# Altium PCB PCB1.PcbDoc
Units mm, origin at the board's own origin, x right, y up, seen from the top; angles counter-clockwise.
Board outline 70 x 27 mm, 2 copper layers (Top Layer, Bottom Layer); 13 components, 21 nets, 135 pads, 0 vias.
Unrouted connection lines stored in the file: 48.
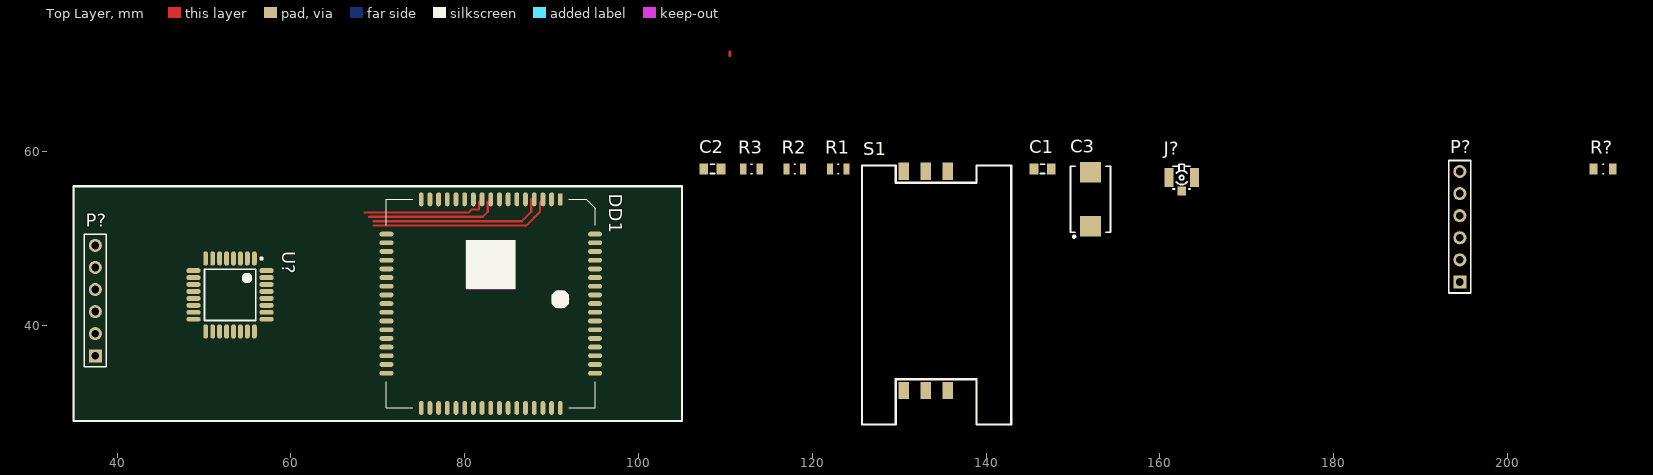
[diagram p0: Top Layer view]
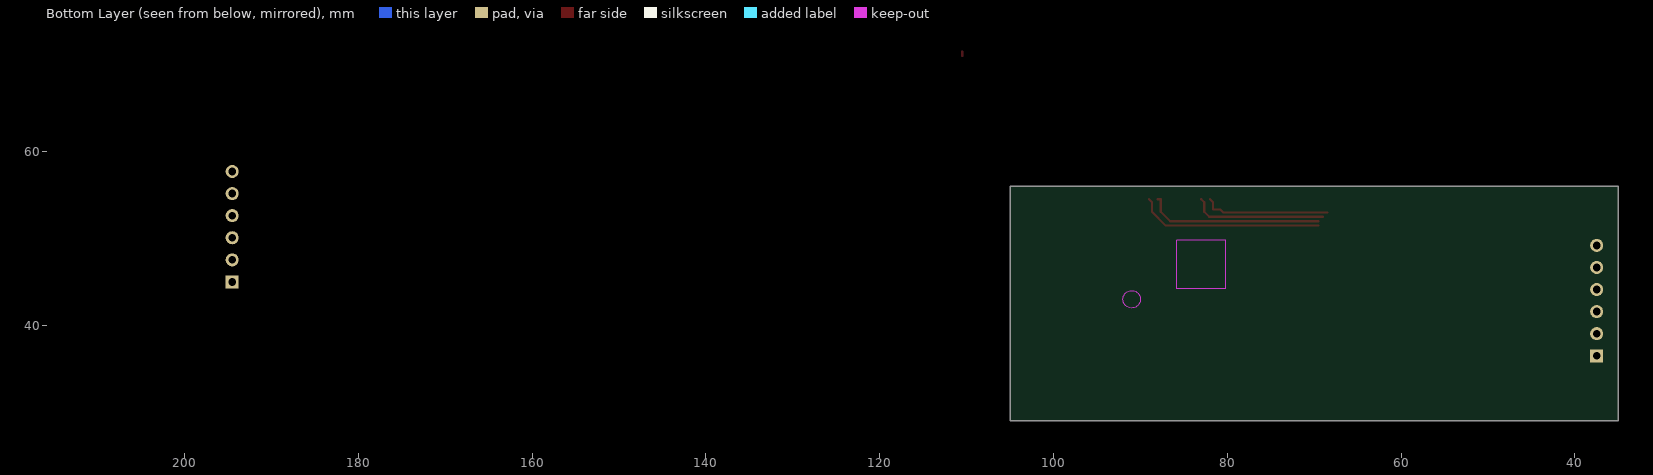
[diagram p1: Bottom Layer view, seen from below]

## Layer stack, top to bottom
Top Solder: solder mask 0.0102, Solder Resist, Dk 3.5
Top Layer: signal copper 0.0356
Dielectric 1: dielectric 0.32, FR-4, Dk 4.8
Bottom Layer: signal copper 0.0356
Bottom Solder: solder mask 0.0102, Solder Resist, Dk 3.5

## Board outline
35,29 35,56 105,56 105,29

## Design rules (kind name [scope] priority, off if disabled: settings)
Clearance [All] p1: gap=0.254
PolygonConnect [All] p1: connectstyle=Relief reliefconductorwidth=0.254 reliefentries=4 polygonreliefangle="90 Angle" airgapwidth=0.254
RoomDefinition Sheet1 [InComponentClass('Sheet1')] p1: confinementstyle=ConfineIn formatcopy=TRUE lockcomponents=FALSE outline 106.5,28 213,28 213,62 106.5,62
RoutingVias [All] p1: holewidth=0.711 width=1.27 viastyle="Through Hole" minholewidth=0.711 minwidth=1.27 maxholewidth=0.711 maxwidth=1.27
SolderMaskExpansion [All] p1: expansion=0.102
Width [All] p1: maxlimit=0.254 minlimit=0.254 preferedwidth=0.254
30 further rules are at their usual default settings.

## Classes and differential pairs
component class Sheet1: C1 C2 C3 DD1 J? P? R1 R2 R3 R? S1 U?

## Components (designator, comment, footprint, x,y, rotation, side; value= is the part's Value field where it differs from the comment)
C1 "Cap" CAPC(0805)2012X07N 146.5,58 r0 top
C2 "Cap" CAPC(0805)2012X07N 108.5,58 r0 top
C3 "10uF" CAPMP7343X310N 152,54.5 r90 top
DD1 "SIM900" SIM900 91,54.5 r270 top
J? "U.FL" HIROSE_U.FL-R-SMT-1(10) 162.5,57 r0 top
P? "Header 6" HDR1X6 194.5,45 r90 top
P? "Header 6" HDR1X6 37.5,36.5 r90 top
R1 "Resistor" RESC(0805)2112X05N 123,58 r0 top
R2 "Resistor" RESC(0805)2112X05N 118,58 r0 top
R3 "Resistor" RESC(0805)2112X05N 113,58 r0 top
R? "Resistor" RESC(0805)2112X05N_wave 211,58 r0 top
S1 "SIM0424" SIM0424 130.5,32.5 r90 top
U? "ATmega8-16AU" 32A_N 53,43.5 r270 top

## Footprints (in the part's own frame and the unit in brackets; to place one, negate y for a bottom-side part, rotate by r counter-clockwise, add the part's x,y. Pads: shape width x height; smd on the part's side, far side on the other; paste and mask are expansions set on the pad)
32A_N [mm] "Thin QFP, 32-Leads, Body 7x7mm, Pitch 0.8mm, IPC Medium Density"
  oval 1.65x0.55 smd: 1(-4.2,2.8) 2(-4.2,2) 3(-4.2,1.2) 4(-4.2,0.4) 5(-4.2,-0.4) 6(-4.2,-1.2) 7(-4.2,-2) 8(-4.2,-2.8) 17(4.2,-2.8) 18(4.2,-2) 19(4.2,-1.2) 20(4.2,-0.4) 21(4.2,0.4) 22(4.2,1.2) 23(4.2,2) 24(4.2,2.8)
  oval 0.55x1.65 smd: 9(-2.8,-4.2) 10(-2,-4.2) 11(-1.2,-4.2) 12(-0.4,-4.2) 13(0.4,-4.2) 14(1.2,-4.2) 15(2,-4.2) 16(2.8,-4.2) 25(2.8,4.2) 26(2,4.2) 27(1.2,4.2) 28(0.4,4.2) 29(-0.4,4.2) 30(-1.2,4.2) 31(-2,4.2) 32(-2.8,4.2)
  silkscreen extent -4.32,-2.95 2.95,3.75, body extent -3.5,-3.5 3.5,3.5, height 1.2
CAPC(0805)2012X07N [mm] "Chip Diode, 2-Leads, Body 2,01x1,25mm, IPC Medium Density"
  rect 1x1.25 smd: 1(-1,0) 2(1,0)
  silkscreen extent -0.25,-0.53 0.25,0.53, body extent -0.8,-0.42 0.8,0.44, height 0.8
CAPMP7343X310N [mm] "Capacitor, Polarized, Molded  Body 7.3x4.3mm, IPC Medium Density"
  rect 2.35x2.45 smd: 1(-3.1,0) 2(3.1,0)
  silkscreen extent -4.42,-2.3 3.8,2.3, body extent -3.8,-2.3 3.8,2.3, height 3.1
HDR1X6 [mm] "Connector; Header; 6 Position"
  rect 1.5x1.5 hole 0.9: 1(0,0)
  round 1.5 hole 0.9: 2(2.54,0) 3(5.08,0) 4(7.62,0) 5(10.16,0) 6(12.7,0)
  silkscreen extent -1.27,-1.27 13.97,1.27
HIROSE_U.FL-R-SMT-1(10) [mm] "Up to 6GHz Ultra Small Surface Mount Male Coaxial Connectors U.FL Series"
  rect 1x1.05 smd: 1(0,-1.525)
  rect 1.05x2.2 smd: 2(-1.475,0) 2(1.475,0)
  silkscreen extent -1,-1.3 1,1.55, body extent -1.5,-1.55 1.5,1.55, height 1.25
RESC(0805)2112X05N [mm] "Chip Diode, 2-Leads, Body 2,05x1,25mm, IPC Medium Density"
  rect 0.7x1.3 smd: 1(-0.95,0) 2(0.95,0)
  silkscreen extent -0.05,-0.55 0.05,0.55, body extent -1,-0.61 1,0.61, height 0.5
RESC(0805)2112X05N_wave [mm] "Chip Diode, 2-Leads, Body 2,05x1,25mm, IPC Medium Density"
  rect 0.9x1.3 smd: 1(-1.1,0) 2(1.1,0)
  silkscreen extent -0.05,-0.55 0.05,0.55, body extent -1,-0.61 1,0.61, height 0.5
SIM0424 [mm] "Sim Holder SIM0424"
  rect 2x1.2 smd: 1(25.22,0) 2(25.22,-2.54) 3(25.22,-5.08) 4(0,0) 5(0,-2.54) 6(0,-5.08)
  silkscreen extent -3.9,-12.4 25.9,4.8, body extent -3.91,-12.4 25.73,4.8, height 2.6
SIM900 [mm] "PCB for sim900"
  rrect50% 1.4x0.55 smd: 1(0,0)
  oval 1.6x0.55 smd: 2(0,-1) 3(0,-2) 4(0,-3) 5(0,-4) 6(0,-5) 7(0,-6) 8(0,-7) 9(0,-8) 10(0,-9) 11(0,-10) 12(0,-11) 13(0,-12) 14(0,-13) 15(0,-14) 16(0,-15) 17(0,-16) 35(24,-16) 36(24,-15) 37(24,-14) 38(24,-13) 39(24,-12) 40(24,-11) 41(24,-10) 42(24,-9) 43(24,-8) 44(24,-7) 45(24,-6) 46(24,-5) 47(24,-4) 48(24,-3) 49(24,-2) 50(24,-1) 51(24,0)
  oval 0.55x1.6 smd: 18(4,-20) 19(5,-20) 20(6,-20) 21(7,-20) 22(8,-20) 23(9,-20) 24(10,-20) 25(11,-20) 26(12,-20) 27(13,-20) 28(14,-20) 29(15,-20) 30(16,-20) 31(17,-20) 32(18,-20) 33(19,-20) 34(20,-20) 52(20,4) 53(19,4) 54(18,4) 55(17,4) 56(16,4) 57(15,4) 58(14,4) 59(13,4) 60(12,4) 61(11,4) 62(10,4) 63(9,4) 64(8,4) 65(7,4) 66(6,4) 67(5,4) 68(4,4)
  Keep-Out Layer circle w0.127: c11.5,0 r1.005
  Keep-Out Layer lines w0.127: 10.3,-10.8 4.7,-10.8 4.7,-5.2 10.3,-5.2 10.3,-10.8
  silkscreen extent 0,-20 24,4, body extent 0,-20 24,4, height 3.02

## Part data
C1 C2: "Capacitor"
C3: library part CTE7343-31_10UF_25V_10%, "Polarised capacitor"
DD1: "GSM/GPRS module SIM900"
J?: library part HIROSE_U.FL-R-SMT-1(10)
P? P?: "Header, 6-Pin"
S1: "Sim Socket SIM0424"
U?: "8-bit AVR Microcontroller, 4.5-5.5V, 16MHz, 8KB Flash, 512 Bytes EEPROM, 1KB SRAM, 32-pin TQFP, Industrial Grade (-40°C to 85°C)"

## Nets (pads, with @x,y where several pads share a name; then routed paths per layer and width w, separated by ;. In a path a pad name is that pad's centre, name@x,y a point inside that pad or via, vN(x,y) a via of type N, cw(c..) or ccw(c..) an arc to the next point about the centre after c; other vN are vias at no path point)
GND: C2.1 DD1.1 S1.4 U?.3 U?.5 U?.21
M_RX-S_TX: DD1.9 P?.1@37.5,36.5 U?.30 | length 15.5
  Top Layer w0.254: 69,52.492 82.086,52.492 82.656,53.062 82.656,54.156 DD1.9
M_TX-S_RX: DD1.10 P?.2@37.5,39.04 U?.31 | length 14.6
  Top Layer w0.254: 68.5,53 80.5,53 80.819,53.319 81.656,53.319 81.656,54.156 DD1.10
MISO: P?.3@194.5,50.08 U?.16
MOSI: P?.4@194.5,52.62 U?.15
NetC1_2: C1.2 C3.2 DD1.17 DD1.18 DD1.29
NetC2_2: C2.2 DD1.31 R3.2
NetC3_1: C3.1 DD1.26
NetDD1_32: DD1.32 R1.2
NetDD1_33: DD1.33 R2.2
NetDD1_39: DD1.39 DD1.45 DD1.46 DD1.53 DD1.54 DD1.58 DD1.59 DD1.61 DD1.62 DD1.63 DD1.64 DD1.65 J?.2
NetDD1_60: DD1.60 J?.1
NETLABEL24: P?.1@194.5,45 R?.2 U?.29
NETLABEL30: R2.1 S1.2
NetR1_1: R1.1 S1.3
NetR3_1: R3.1 S1.6
RI: DD1.4 P?.3@37.5,41.58 U?.32 | length 20.4
  Top Layer w0.254: 69.5,51.984 86.578,51.984 87.656,53.062 87.656,54.5 DD1.4
SCK: P?.2@194.5,47.54 U?.17
SIM_VDD: C1.1 DD1.30 S1.1
SLEEP: DD1.3 P?.4@37.5,44.12 U?.1 | length 21.4
  Top Layer w0.254: 69.5,51.476 87.07,51.476 88.656,53.062 88.656,54.156 DD1.3
VCC: R?.1 U?.4 U?.6
pads on no net: DD1.2 DD1.5 DD1.6 DD1.7 DD1.8 DD1.11 DD1.12 DD1.13 DD1.14 DD1.15 DD1.16 DD1.19 DD1.20 DD1.21 DD1.22 DD1.23 DD1.24 DD1.25 DD1.27 DD1.28 DD1.34 DD1.35 DD1.36 DD1.37 DD1.38 DD1.40 DD1.41 DD1.42 DD1.43 DD1.44 DD1.47 DD1.48 DD1.49 DD1.50 DD1.51 DD1.52 DD1.55 DD1.56 DD1.57 DD1.66 DD1.67 DD1.68 P?.5 P?.6 S1.5 U?.2 U?.7 U?.8 U?.9 U?.10 U?.11 U?.12 U?.13 U?.14 U?.18 U?.19 U?.20 U?.22 U?.23 U?.24 U?.25 U?.26 U?.27 U?.28
copper on no net: | length 0.5
  Top Layer w0.254: 110.5,71 110.5,71.5

## Silkscreen, mask and mechanical layers (free items; w line width, h text height)
Top Overlay:
  lines w0.254: 35,29 105,29 105,56 35,56 35,30 35,29